# Altium PCB Horloge_seb.PcbDoc
Units mm, origin at the board's own origin, x right, y up, seen from the top; angles counter-clockwise.
Board outline 82 x 79 mm, 2 copper layers (Top Layer, Bottom Layer); 82 components, 100 nets, 338 pads, 55 vias.
Unrouted connection lines stored in the file: 4.
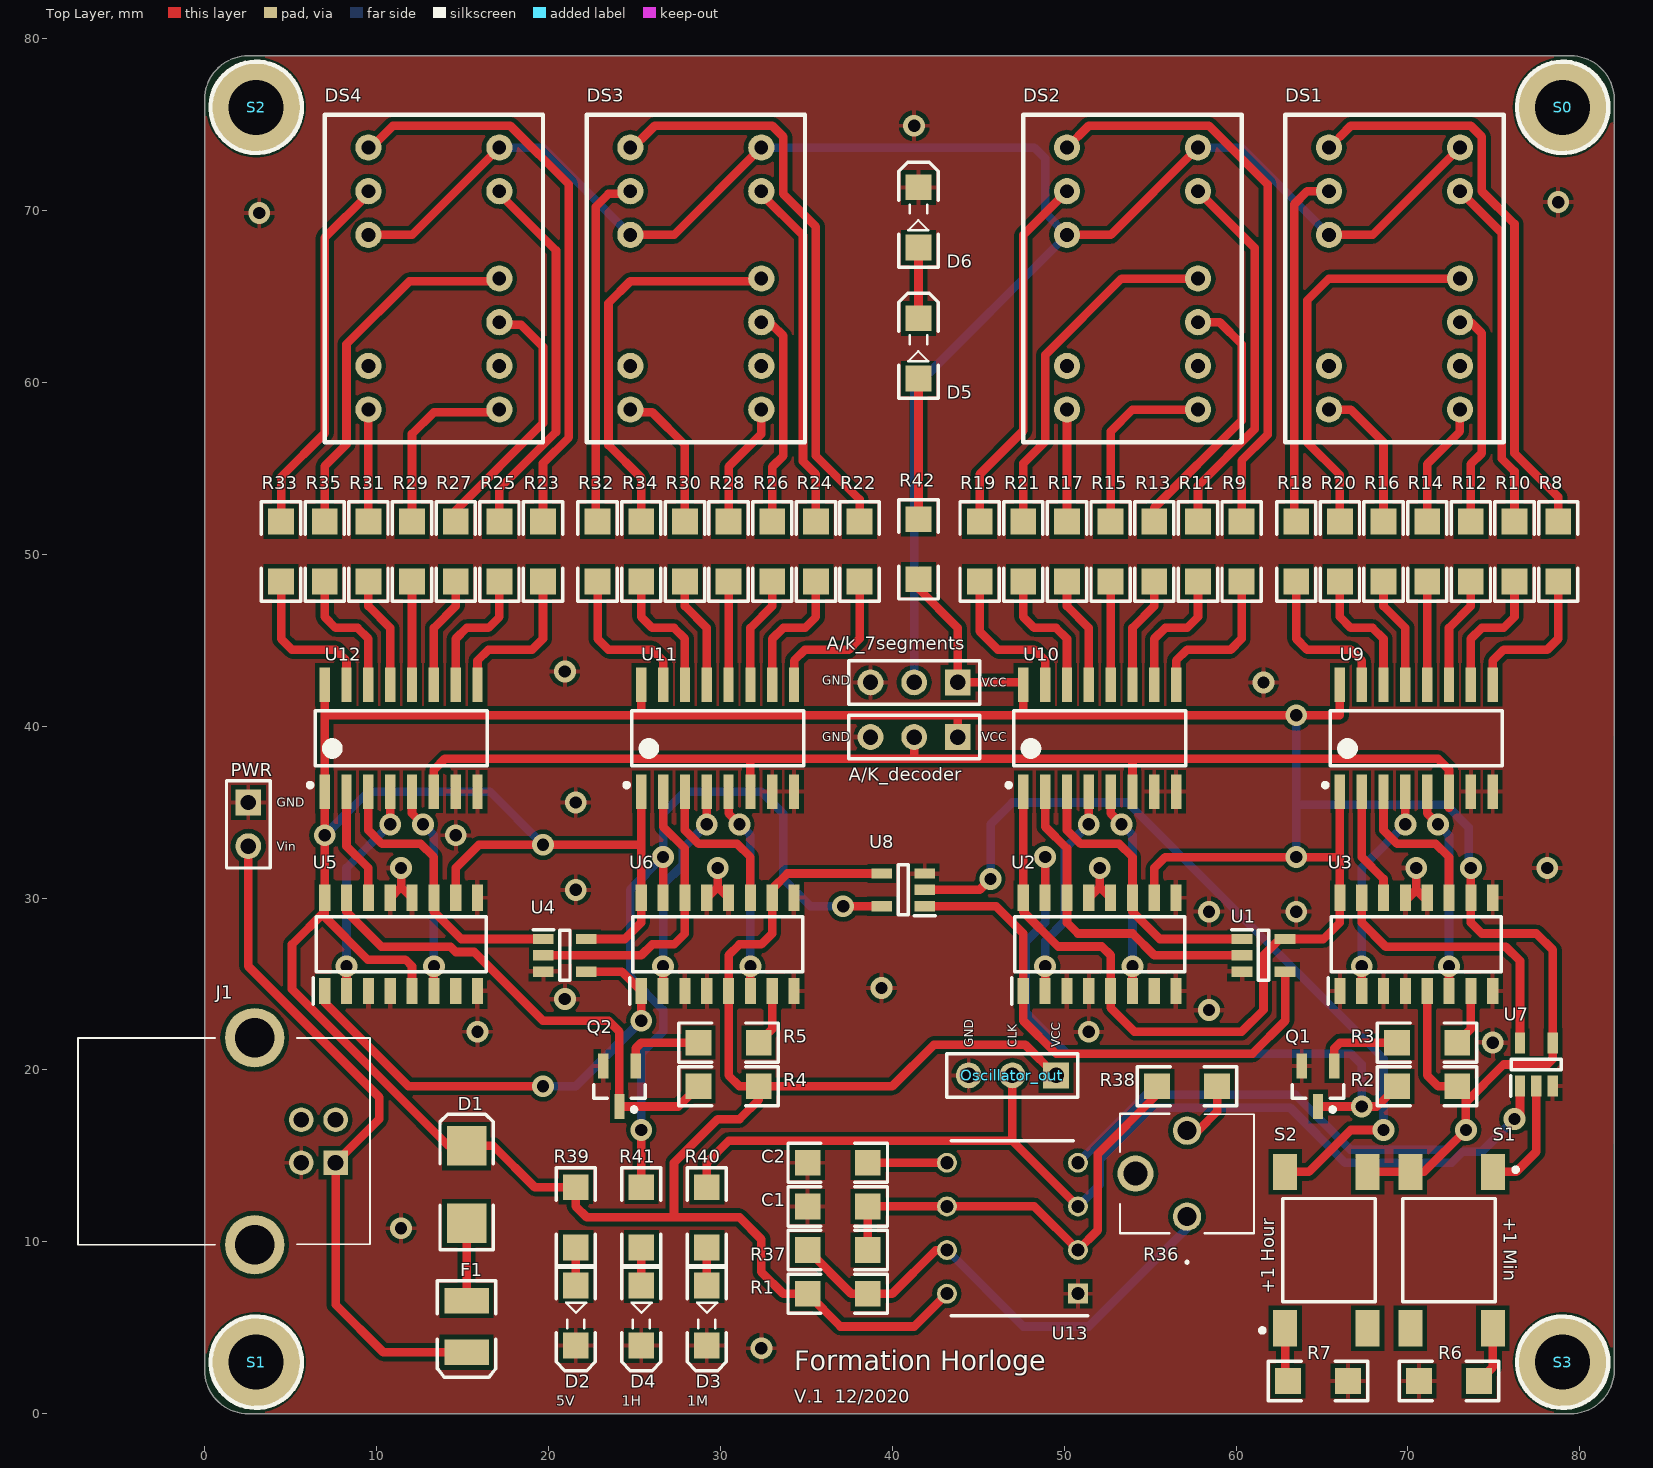
[diagram p0: Top Layer view]
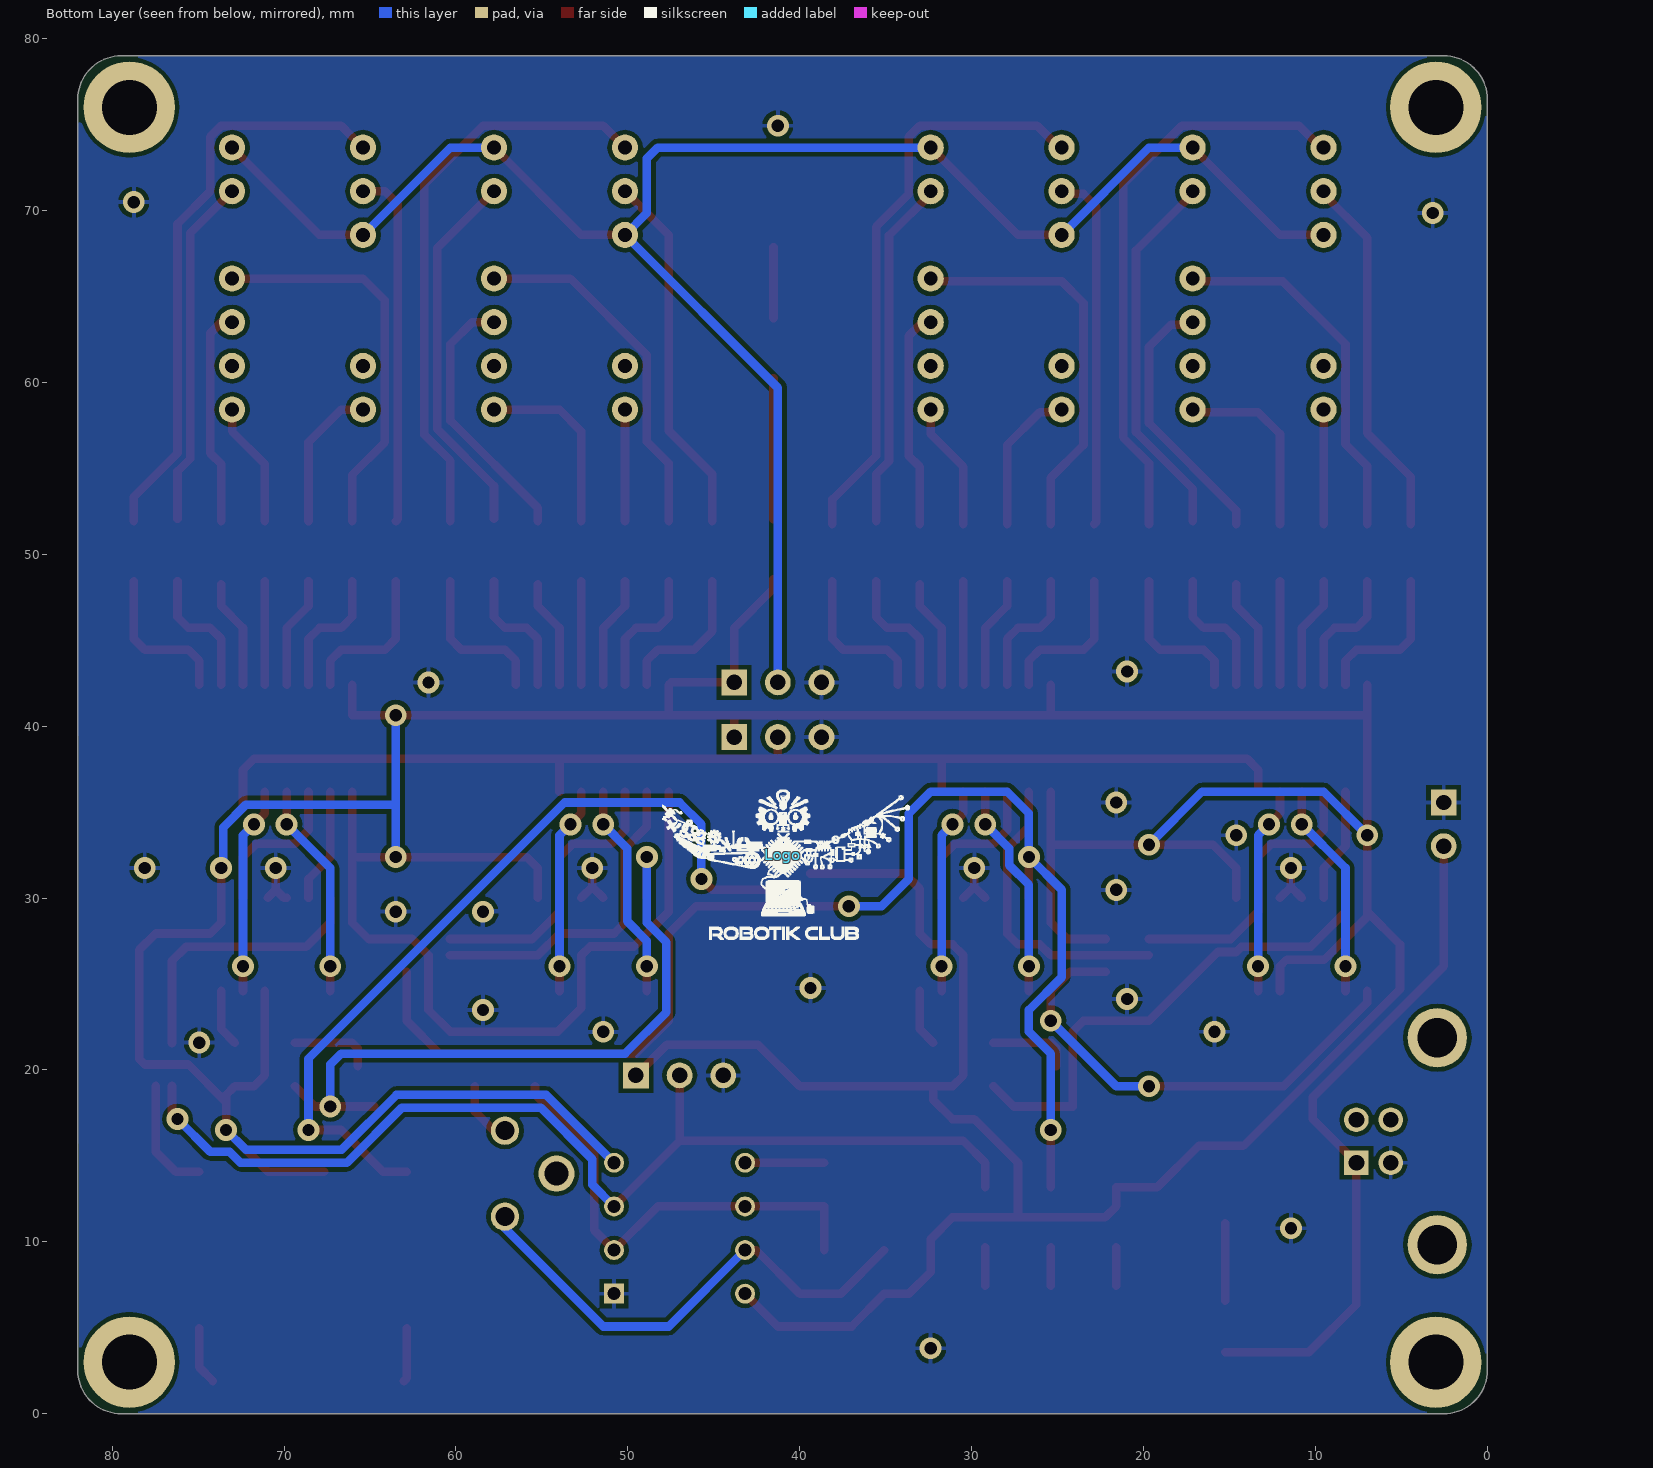
[diagram p1: Bottom Layer view, seen from below]
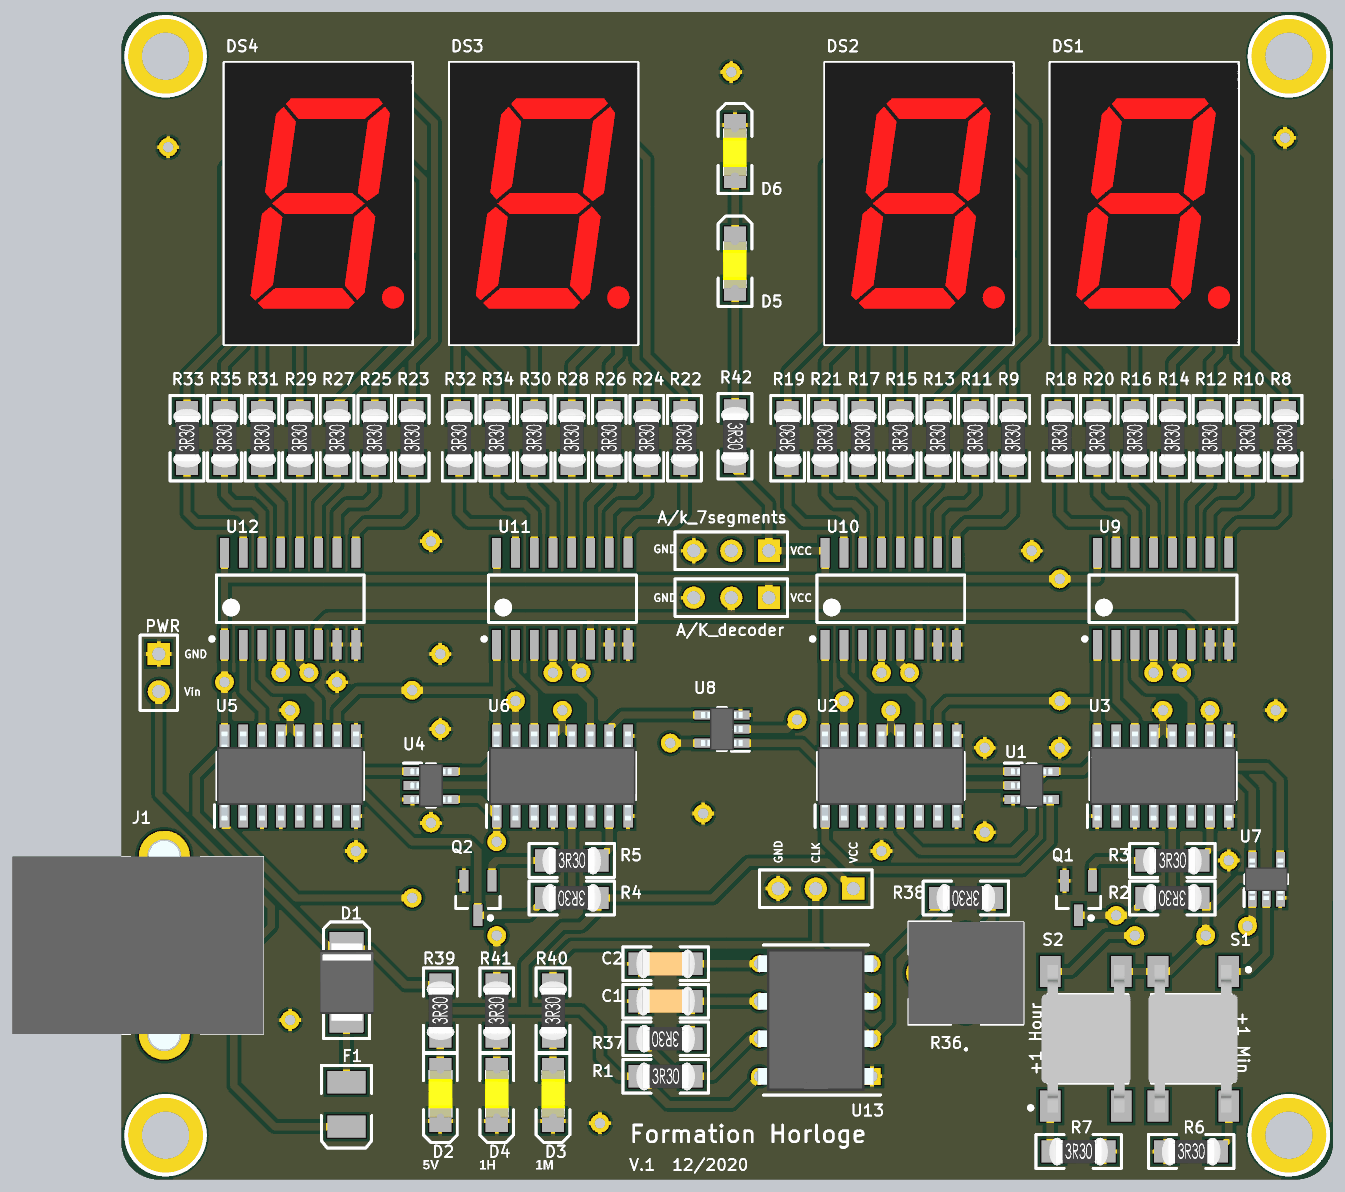
[diagram p2: 3D render of the assembled board from above, using the file's embedded part models]

## Layer stack, top to bottom
Top Solder: solder mask 0.0102, Solder Resist, Dk 3.5
Top Layer: signal copper 0.0356
Dielectric 1: dielectric 0.32, FR-4, Dk 4.8
Bottom Layer: signal copper 0.0356
Bottom Solder: solder mask 0.0102, Solder Resist, Dk 3.5

## Board outline
0,52 0,76.46 cw(c2.54,76.46) 2.54,79 19,79 79.46,79 cw(c79.46,76.46) 82,76.46 82,48 82,2.54 cw(c79.46,2.54) 79.46,0 59,0 2.54,0 cw(c2.54,2.54) 0,2.54 0,20

## Design rules (kind name [scope] priority, off if disabled: settings)
Clearance [All] p1: gap=0.254
PolygonConnect [All] p1: connectstyle=Relief reliefconductorwidth=0.254 reliefentries=4 polygonreliefangle="90 Angle" airgapwidth=0.254
RoutingVias [All] p1: holewidth=0.711 width=1.27 viastyle="Through Hole" minholewidth=0.711 minwidth=1.27 maxholewidth=0.711 maxwidth=1.27
SolderMaskExpansion [All] p1: expansion=0.102
Width [All] p1: maxlimit=2 minlimit=0.1 preferedwidth=0.5
30 further rules are at their usual default settings.

## Classes and differential pairs
component class Horloge_Counter: Q1 Q2 R2 R3 R4 R5 R6 R7 S1 S2 U1 U2 U3 U4 U5 U6 U7 U8
component class Horloge_Display: A/k_7segments A/K_decoder DS1 DS2 DS3 DS4 R8 R9 R10 R11 R12 R13 R14 R15 R16 R17 R18 R19 R20 R21 R22 R23 R24 R25 R26 R27 R28 R29 R30 R31 R32 R33 R34 R35 U9 U10 U11 U12
component class Horloge_Oscillator: C1 C2 D1 D2 D3 D4 D5 D6 F1 J1 Oscillator_out PWR R1 R36 R37 R38 R39 R40 R41 R42 S0 S1 S2 S3 U13

## Components (designator, comment, footprint, x,y, rotation, side; value= is the part's Value field where it differs from the comment)
A/k_7segments "Common_7-segments" HDR1X3 43.815,42.545 r180 top (schematic designator A/k_7_segments)
A/K_decoder "Header 3" HDR1X3 43.815,39.37 r180 top
C1 "Cap Pol1" "Capacitor 1206" 36.83,12.065 r180 top
C2 "Cap" "Capacitor 1206" 36.83,14.605 r0 top
D1 "LGE SS12" SMB 15.24,13.335 r180 top
D2 "5V_OK" KP-3216SEC 21.59,5.715 r270 top
D3 "CLK" KP-3216SEC 29.21,5.715 r270 top
D4 "HOUR" KP-3216SEC 25.4,5.715 r270 top
D5 "point" KP-3216SEC 41.529,61.976 r90 top
D6 "point" KP-3216SEC 41.529,69.596 r90 top
DS1 "Dpy Red-CA" "7 SEGMENTS 5082-7731" 65.405,73.66 r0 top
DS2 "Dpy Red-CA" "7 SEGMENTS 5082-7731" 50.165,73.66 r0 top
DS3 "Dpy Red-CA" "7 SEGMENTS 5082-7731" 24.765,73.66 r0 top
DS4 "Dpy Red-CA" "7 SEGMENTS 5082-7731" 9.525,73.66 r0 top
F1 "1A" 3.5X2.8X1.9 15.24,5.08 r270 top
J1 "67068-0000" 670680000 7.62,14.605 r270 top
Logo "Comment" Logo_lowres 41,32.508 r180 bottom
Oscillator_out "Header 3" HDR1X3 49.53,19.685 r180 top
PWR "Header 2" HDR1X2 2.54,35.56 r270 top (schematic designator P1)
Q1 "MOSFET-N" SOT23_M 64.77,19.05 r270 top
Q2 "MOSFET-N" SOT23_M 24.13,19.05 r270 top
R1 "Res2" "Resistor 1206" 36.83,6.985 r0 top
R2 "Res2" "Resistor 1206" 71.12,19.05 r180 top
R3 "Res2" "Resistor 1206" 71.12,21.59 r0 top
R4 "Res2" "Resistor 1206" 30.48,19.05 r180 top
R5 "Res2" "Resistor 1206" 30.48,21.59 r0 top
R6 "Res2" "Resistor 1206" 72.39,1.905 r0 top
R7 "Res2" "Resistor 1206" 64.77,1.905 r0 top
R8 "Res2" "Resistor 1206" 78.74,50.165 r90 top
R9 "Res2" "Resistor 1206" 60.325,50.165 r90 top
R10 "Res2" "Resistor 1206" 76.2,50.165 r90 top
R11 "Res2" "Resistor 1206" 57.785,50.165 r90 top
R12 "Res2" "Resistor 1206" 73.66,50.165 r90 top
R13 "Res2" "Resistor 1206" 55.245,50.165 r90 top
R14 "Res2" "Resistor 1206" 71.12,50.165 r90 top
R15 "Res2" "Resistor 1206" 52.705,50.165 r90 top
R16 "Res2" "Resistor 1206" 68.58,50.165 r90 top
R17 "Res2" "Resistor 1206" 50.165,50.165 r90 top
R18 "Res2" "Resistor 1206" 63.5,50.165 r90 top
R19 "Res2" "Resistor 1206" 45.085,50.165 r90 top
R20 "Res2" "Resistor 1206" 66.04,50.165 r90 top
R21 "Res2" "Resistor 1206" 47.625,50.165 r90 top
R22 "Res2" "Resistor 1206" 38.1,50.165 r90 top
R23 "Res2" "Resistor 1206" 19.685,50.165 r90 top
R24 "Res2" "Resistor 1206" 35.56,50.165 r90 top
R25 "Res2" "Resistor 1206" 17.145,50.165 r90 top
R26 "Res2" "Resistor 1206" 33.02,50.165 r90 top
R27 "Res2" "Resistor 1206" 14.605,50.165 r90 top
R28 "Res2" "Resistor 1206" 30.48,50.165 r90 top
R29 "Res2" "Resistor 1206" 12.065,50.165 r90 top
R30 "Res2" "Resistor 1206" 27.94,50.165 r90 top
R31 "Res2" "Resistor 1206" 9.525,50.165 r90 top
R32 "Res2" "Resistor 1206" 22.86,50.165 r90 top
R33 "Res2" "Resistor 1206" 4.445,50.165 r90 top
R34 "Res2" "Resistor 1206" 25.4,50.165 r90 top
R35 "Res2" "Resistor 1206" 6.985,50.165 r90 top
R36 "RPot" EVMAASA00B15 57.15,13.97 r90 top
R37 "Res2" "Resistor 1206" 36.83,9.525 r180 top
R38 "Res2" "Resistor 1206" 57.15,19.05 r180 top
R39 "Res2" "Resistor 1206" 21.59,11.43 r90 top
R40 "Res2" "Resistor 1206" 29.21,11.43 r90 top
R41 "Res2" "Resistor 1206" 25.4,11.43 r90 top
R42 "Res2" "Resistor 1206" 41.529,50.292 r270 top
S0 "Screw M3" "Screw M3" 79,76 r0 top
S1 "4-1437565-1" FSM-SWITCH 72.39,9.525 r0 top
S1 "Screw M3" "Screw M3" 3,3 r0 top
S2 "4-1437565-1" FSM-SWITCH 65.405,9.525 r180 top
S2 "Screw M3" "Screw M3" 3,76 r0 top
S3 "Screw M3" "Screw M3" 79,3 r0 top
U1 "SN74AHC1G08DBVR" SOT95P280X145-5N 61.595,26.67 r0 top
U2 "CD4029BM96" SOIC127P600X175-16N 52.07,27.305 r90 top
U3 "CD4029BM96" SOIC127P600X175-16N 70.485,27.305 r90 top
U4 "SN74AHC1G08DBVR" SOT95P280X145-5N 20.955,26.67 r0 top
U5 "CD4029BM96" SOIC127P600X175-16N 11.43,27.305 r90 top
U6 "CD4029BM96" SOIC127P600X175-16N 29.845,27.305 r90 top
U7 "SN74LVC1G32DBVT" SOT95P280X145-5N 77.47,20.32 r90 top
U8 "SN74LVC1G32DBVT" SOT95P280X145-5N 40.64,30.48 r180 top
U9 "7 segment driver" HEF4543 66.04,36.195 r90 top
U10 "7 segment driver" HEF4543 47.625,36.195 r90 top
U11 "7 segment driver" HEF4543 25.4,36.195 r90 top
U12 "7 segment driver" HEF4543 6.985,36.195 r90 top
U13 "NE555N" DIP762W56P254L959H533Q8N 46.99,10.795 r180 top

## Footprints (in the part's own frame and the unit in brackets; to place one, negate y for a bottom-side part, rotate by r counter-clockwise, add the part's x,y. Pads: shape width x height; smd on the part's side, far side on the other; paste and mask are expansions set on the pad)
3.5X2.8X1.9 [mm] "SM LED; 2 C-Bend Leads; Body 3.5 x 2.8 x 1.9 mm, inc leads (LxWxH typ)"
  rect 1.5x2.6 smd: 1(-1.5,0) 2(1.5,0)
  silkscreen extent -2.65,-1.7 2.95,1.7
"7 SEGMENTS 5082-7731" [mil] "pour Dpy Red-CA"
  round 60 hole 31.5: 1(0,-200) 2(0,-100) 3(300,-300) 4(0,-600) 5(300,-600) 6(300,0) 7(0,-500) 8(300,-400) 9(300,-100) 10(0,0) 14(300,-500)
  silkscreen extent -100,-675 400,75, body extent -100,-675 400,75, height 315
670680000 [mm]
  rect 1.431x1.431 hole 0.92: 1(0,0)
  round 1.431 hole 0.92: 2(-2.5,0) 3(-2.5,-2) 4(0,-2)
  round 3.45 hole 2.3: MH1(4.77,-4.71) MH2(-7.27,-4.71)
  silkscreen extent -7.25,-15 4.77,2, body extent -8.32,-14.99 5.82,2.01, height 11.1
"Capacitor 1206" [mm]
  rect 1.5x1.5 smd: 1(-1.75,0) 2(1.75,0)
  silkscreen extent -2.89,-1.14 2.89,1.14, body extent -1.98,-0.99 1.98,0.96, height 1.3
DIP762W56P254L959H533Q8N [mm]
  rect 1.16x1.16 hole 0.76: 1(-3.81,3.81)
  round 1.16 hole 0.76: 2(-3.81,1.27) 3(-3.81,-1.27) 4(-3.81,-3.81) 5(3.81,-3.81) 6(3.81,-1.27) 7(3.81,1.27) 8(3.81,3.81)
  silkscreen extent -4.39,-5.08 3.55,5.08, body extent -3.95,-4.79 3.95,4.79, height 5.33
EVMAASA00B15 [mm]
  round 1.65 hole 1.1: 1(-2.5,0) 3(2.5,0)
  round 2.1 hole 1.4: 2(0,3)
  silkscreen extent -5.2,-3.9 3.5,3.9, body extent -3.45,-3.9 3.45,3.9, height 7.7
FSM-SWITCH [mm]
  rect 1.4x2.1 smd: 1(2.55,4.55) 2(2.55,-4.55) 3(-2.25,4.55) 4(-2.25,-4.55)
  silkscreen extent -2.7,-3 4,4.8, body extent -2.87,-5 3.13,5, height 5.1
HDR1X2 [mm] "Connector; Header; 2 Position"
  rect 1.5x1.5 hole 0.9: 1(0,0)
  round 1.5 hole 0.9: 2(2.54,0)
  silkscreen extent -1.27,-1.27 3.81,1.27
HDR1X3 [mm] "Connector; Header; 3 Position"
  rect 1.5x1.5 hole 0.9: 1(0,0)
  round 1.5 hole 0.9: 2(2.54,0) 3(5.08,0)
  silkscreen extent -1.27,-1.27 6.35,1.27
HEF4543 [mm] "SOP, 16-Leads, Body 9,90x3,90mm, Pitch 1,27mm, IPC Medium Density"
  rect 2x0.6 smd: 1(0,0) 2(0,-1.27) 3(0,-2.54) 4(0,-3.81) 5(0,-5.08) 6(0,-6.35) 7(0,-7.62) 8(0,-8.89) 9(6.212,-8.89) 10(6.212,-7.62) 11(6.212,-6.35) 12(6.212,-5.08) 13(6.212,-3.81) 14(6.212,-2.54) 15(6.212,-1.27) 16(6.212,0)
  silkscreen extent 0.26,-9.45 4.71,0.97, body extent 1.11,-9.45 5.11,0.56, height 1.75
KP-3216SEC [mm]
  rect 1.5x1.5 smd: 1(-1.75,0) 2(1.75,0)
  silkscreen extent -2.89,-1.14 3.2,1.14, body extent -1.7,-0.79 1.5,0.81, height 1.1
Logo_lowres [mm]
  silkscreen extent -7.01,-4.93 7.39,3.76
"Resistor 1206" [mm]
  rect 1.5x1.5 smd: 1(-1.75,0) 2(1.75,0)
  silkscreen extent -2.89,-1.14 2.89,1.14, body extent -1.98,-0.95 1.98,0.93, height 0.55
"Screw M3" [mm] "M3 iso Screw"
  round 5.32 hole 3.2 unplated: 0(0,0)
  silkscreen extent -2.66,-2.66 2.66,2.66
SMB [mm] "SMB Didoe"
  rect 2.3x2.3 smd: 1(0,2.25) 2(0,-2.25)
  silkscreen extent -1.55,-4.1 1.55,3.8, body extent -1.84,-2.67 1.78,2.62, height 2.2
SOIC127P600X175-16N [mm]
  rect 1.525x0.65 smd: 1(-2.712,4.445) 2(-2.712,3.175) 3(-2.712,1.905) 4(-2.712,0.635) 5(-2.712,-0.635) 6(-2.712,-1.905) 7(-2.712,-3.175) 8(-2.712,-4.445) 9(2.712,-4.445) 10(2.712,-3.175) 11(2.712,-1.905) 12(2.712,-0.635) 13(2.712,0.635) 14(2.712,1.905) 15(2.712,3.175) 16(2.712,4.445)
  silkscreen extent -3.47,-4.95 1.6,5.12, body extent -3,-4.95 3,4.95, height 1.75
SOT23_M [mm] "SOT23, 3-Leads, Body 2.9x1.3mm, Pitch 0.95mm, Lead Span 2.3mm - Reverse Pinning, IPC Low Density"
  rect 1.45x0.6 smd: 1(1.175,0) 2(-1.175,-0.95) 3(-1.175,0.95)
  silkscreen extent -0.1,-1.5 1.47,1.5, body extent -0.7,-1.5 0.7,1.5, height 1.1
SOT95P280X145-5N [mm]
  rect 1.2x0.6 smd: 1(-1.25,0.95) 2(-1.25,0) 3(-1.25,-0.95) 4(1.25,-0.95) 5(1.25,0.95)
  silkscreen extent -1.85,-1.45 0.3,1.5, body extent -1.4,-1.45 1.4,1.45, height 1.45

## Part data
A/k_7segments: library part "Header 3", "Header, 3-Pin"
A/K_decoder Oscillator_out: "Header, 3-Pin"
C1: "Polarized Capacitor (Radial)"
C2: "Capacitor"
D1: library part Diode, "Default Diode"
D2 D3 D4 D5 D6: library part LED2, "Typical RED, GREEN, YELLOW, AMBER GaAs LED"
DS1 DS2 DS3 DS4: "7.62 mm Black Surface HER 7-Segment Display: CA, RH DP"
F1: library part "Fuse 2", "Fuse"
J1: "Connector"
PWR: "Header, 2-Pin"
Q1 Q2: "N-Channel MOSFET"
R1 R2 R3 R4 R5 R6 R7 R8 R9 R10 R11 R12 R13 R14 R15 R16 R17 R18 R19 R20 R21 R22 R23 R24 R25 R26 R27 R28 R29 R30 R31 R32 R33 R34 R35 R37 R38 R39 R40 R41 R42: "Resistor"
R36: "Potentiometer"
S1 S2: "Switch"
U1 U4: "Undefined or Miscellaneous"
U2 U3 U5 U6 U7 U8 U13: "Integrated Circuit"
U9 U10 U11 U12: library part HEF4543B

## Via types
v1: diameter 1.27, hole 0.711, Top Layer to Bottom Layer, 55 vias

## Nets (pads, with @x,y where several pads share a name; then routed paths per layer and width w, separated by ;. In a path a pad name is that pad's centre, name@x,y a point inside that pad or via, vN(x,y) a via of type N, cw(c..) or ccw(c..) an arc to the next point about the centre after c; other vN are vias at no path point)
1_HOUR: R41.2 U6.15 U8.5 | length 44.5
  Top Layer w0.5: R41.2 v1(25.4,16.51) ; U6.15 v1(26.67,32.385) ; v1(37.145,29.53) U8.5
  Bottom Layer w0.5: v1(25.4,16.51) 25.4,20.955 26.67,22.225 26.67,23.495 24.765,25.4 24.765,30.48 v1(26.67,32.385) 26.67,34.925 27.94,36.195 32.385,36.195 33.655,34.925 33.655,31.115 35.24,29.53 v1(37.145,29.53)
1_HOUR_BTN: R7.1 S2.1 S2.2 U8.2 | length 50.8
  Top Layer w0.5: U8.2 45.085,30.48 v1(45.72,31.115) ; S2.1 62.855,2.07 R7.1 ; S2.2 64.24,14.075 66.675,16.51 v1(68.58,16.51)
  Bottom Layer w0.5: v1(45.72,31.115) 45.72,34.29 46.99,35.56 53.681,35.56 68.58,20.661 v1(68.58,16.51)
1_MINUTE: U3.15 U7.5 | length 16.4
  Top Layer w0.5: U3.15 67.31,28.575 68.711,27.174 75.696,27.174 76.52,26.35 U7.5
1_MINUTE_BTN: R6.2 S1.1 S1.2 U7.2 | length 10.2
  Top Layer w0.5: R6.2 74.94,2.705 S1.2 ; S1.1 76.305,14.075 77.47,15.24 U7.2
10_HEURES: Q2.1 R4.2 U5.15 | length 29
  Top Layer w0.5: U5.15 8.255,29.21 10.291,27.174 14.305,27.174 14.613,26.866 15.679,26.866 19.685,22.86 23.495,22.86 24.13,22.225 Q2.1 27.555,17.875 R4.2
10_MINUTES: Q1.1 R2.2 U2.15 | length 40.2
  Top Layer w0.5: U2.15 v1(48.895,32.385) ; Q1.1 v1(67.31,17.875) 68.195,17.875 R2.2
  Bottom Layer w0.5: v1(48.895,32.385) 48.895,28.575 47.756,27.436 47.756,23.364 50.165,20.955 66.675,20.955 67.31,20.32 v1(67.31,17.875)
24_HEURES: U4.4 U5.1 U6.1 | length 28.1
  Top Layer w0.5: U5.1 6.985,23.926 11.861,19.05 v1(19.685,19.05) ; U4.4 24.273,25.72 U6.1 v1(25.4,22.86)
  Bottom Layer w0.5: v1(19.685,19.05) 21.59,19.05 v1(25.4,22.86)
60_MINUTES: U1.4 U2.1 U8.1 | length 31.1
  Top Layer w0.5: U8.1 46.035,29.53 47.625,27.94 U2.1 47.625,22.86 49.53,20.955 60.96,20.955 62.865,22.86 U1.4@62.865,25.7
CLOCK: Oscillator_out.2 R40.2 U7.1 U13.3 | length 62
  Top Layer w0.5: R40.2 29.21,14.605 30.48,15.875 46.99,15.875 ; Oscillator_out.2 46.99,15.875 ; U13.3 46.99,15.875 ; v1(76.2,17.145) 76.52,17.465 U7.1
  Bottom Layer w0.5: U13.3 52.07,13.335 52.07,14.809 55.06,17.799 63.15,17.799 66.344,14.605 72.531,14.605 73.166,15.24 74.295,15.24 v1(76.2,17.145)
GND: A/k_7segments.3 A/K_decoder.3 C1.2 C2.1 D2.2 D3.2 D4.2 D6.2 J1.4 Oscillator_out.3 PWR.1 Q1.2 Q2.2 R6.1 R7.2 U1.3 U2.3 U2.4 U2.8 U2.9 U2.12 U2.13 U3.1 U3.3 U3.4 U3.8 U3.9 U3.12 U3.13 U4.3 U5.3 U5.4 U5.8 U5.9 U5.12 U5.13 U6.3 U6.4 U6.8 U6.9 U6.12 U6.13 U7.3 U8.3 U9.7 U9.8 U10.7 U10.8 U11.7 U11.8 U12.7 U12.8 U13.1 | length 11.4
  Top Layer w0.5: U5.13 11.43,30.652 ; v1(11.43,31.75) 11.43,30.652 ; U5.12 11.43,30.652 ; U6.13 29.845,30.652 ; v1(29.845,31.75) 29.845,30.652 ; U6.12 29.845,30.652 ; U2.13 52.07,30.652 ; v1(52.07,31.75) 52.07,30.652 ; U2.12 52.07,30.652 ; U3.13 70.022,30.017 70.485,30.48 ; v1(70.485,31.75) 70.485,30.48 ; U3.12@70.948,30.017 70.485,30.48
  other v1: 32.385,3.81 11.43,10.795 74.93,21.59 15.875,22.225 51.435,22.225 58.42,23.495 20.955,24.13 39.37,24.765 58.42,29.21 63.5,29.21 21.59,30.48 78.105,31.75 14.605,33.655 21.59,35.56 61.595,42.545 20.955,43.18 3.175,69.85 78.74,70.485 41.275,74.93
HEURES_DIZAINES_D0: U5.6 U12.5 | length 12.1
  Top Layer w0.5: U12.5 12.065,34.925 v1(12.7,34.29) ; U5.6 v1(13.335,26.035)
  Bottom Layer w0.5: v1(12.7,34.29) 13.335,33.655 v1(13.335,26.035)
HEURES_DIZAINES_D1: U4.1 U5.11 U12.3 | length 16.9
  Top Layer w0.5: U12.3 9.525,33.949 10.323,33.151 12.569,33.151 13.335,32.385 U5.11 13.335,29.21 14.925,27.62 U4.1
HEURES_DIZAINES_D2: U5.14 U12.2 | length 6.7
  Top Layer w0.5: U12.2 8.255,33.02 9.525,31.75 U5.14
HEURES_DIZAINES_D3: U5.2 U12.4 | length 12.7
  Top Layer w0.5: U5.2 v1(8.255,26.035) ; v1(10.795,34.29) U12.4
  Bottom Layer w0.5: v1(8.255,26.035) 8.255,31.75 v1(10.795,34.29)
HEURES_UNITES_D0: U6.6 U11.5 | length 12.1
  Top Layer w0.5: U11.5 30.48,34.925 v1(31.115,34.29) ; U6.6 v1(31.75,26.035)
  Bottom Layer w0.5: v1(31.115,34.29) 31.75,33.655 v1(31.75,26.035)
HEURES_UNITES_D1: U6.11 U11.3 | length 9.1
  Top Layer w0.5: U11.3 27.94,33.949 28.738,33.151 30.984,33.151 31.75,32.385 U6.11
HEURES_UNITES_D2: U4.2 U6.14 U11.2 | length 17.5
  Top Layer w0.5: U4.2 25.4,26.67 26.035,27.305 27.305,27.305 27.94,27.94 U6.14 27.94,32.883 26.67,34.153 U11.2
HEURES_UNITES_D3: U6.2 U11.4 | length 12.7
  Top Layer w0.5: U6.2 v1(26.67,26.035) ; v1(29.21,34.29) U11.4
  Bottom Layer w0.5: v1(26.67,26.035) 26.67,30.774 27.809,31.913 27.809,32.889 v1(29.21,34.29)
LED_ANODE_CATHODE?: A/k_7segments.2 DS1.1 DS1.6 DS2.1 DS2.6 DS3.1 DS3.6 DS4.1 DS4.6 | length 109.8
  Top Layer w0.5: DS4.1 12.065,68.58 DS4.6 ; DS3.1 27.305,68.58 DS3.6 ; DS2.1 52.705,68.58 DS2.6 ; DS1.1 67.945,68.58 DS1.6
  Bottom Layer w0.5: DS4.6 19.685,73.66 DS3.1 ; DS3.6 48.26,73.66 48.895,73.025 48.895,69.85 DS2.1 41.275,59.69 A/k_7segments.2 ; DS2.6 60.325,73.66 DS1.1
MINUTES_DIZAINES_D0: U2.6 U10.5 | length 12.1
  Top Layer w0.5: U10.5 52.705,34.925 v1(53.34,34.29) ; U2.6 v1(53.975,26.035)
  Bottom Layer w0.5: v1(53.34,34.29) 53.975,33.655 v1(53.975,26.035)
MINUTES_DIZAINES_D1: U1.1 U2.11 U10.3 | length 16.9
  Top Layer w0.5: U10.3 50.165,33.949 50.963,33.151 53.209,33.151 53.975,32.385 U2.11 53.975,29.21 55.565,27.62 U1.1
MINUTES_DIZAINES_D2: U1.2 U2.14 U10.2 | length 19.1
  Top Layer w0.5: U10.2 48.895,34.153 50.165,32.883 U2.14 50.165,28.575 50.8,27.94 53.975,27.94 55.245,26.67 U1.2
MINUTES_DIZAINES_D3: U2.2 U10.4 | length 12.7
  Top Layer w0.5: U2.2 v1(48.895,26.035) ; v1(51.435,34.29) U10.4
  Bottom Layer w0.5: v1(48.895,26.035) 48.895,27.509 50.034,28.648 50.034,32.889 v1(51.435,34.29)
MINUTES_UNITES_D0: U3.6 U9.5 | length 12.1
  Top Layer w0.5: U9.5 71.12,34.925 v1(71.755,34.29) ; U3.6 v1(72.39,26.035)
  Bottom Layer w0.5: v1(71.755,34.29) 72.39,33.655 v1(72.39,26.035)
MINUTES_UNITES_D1: U3.11 U9.3 | length 9.1
  Top Layer w0.5: U9.3 68.58,33.949 69.378,33.151 71.624,33.151 72.39,32.385 U3.11
MINUTES_UNITES_D2: U3.14 U9.2 | length 6.7
  Top Layer w0.5: U9.2 67.31,32.385 68.58,31.115 U3.14
MINUTES_UNITES_D3: U3.2 U9.4 | length 12.7
  Top Layer w0.5: U3.2 v1(67.31,26.035) ; v1(69.85,34.29) U9.4
  Bottom Layer w0.5: v1(67.31,26.035) 67.31,31.75 v1(69.85,34.29)
NetC1_1: C1.1 R37.1 R38.2 U13.2 U13.6 | length 27.2
  Top Layer w0.5: R37.1 C1.1 U13.6 48.26,12.065 U13.2 51.95,10.675 51.95,15.12 55.4,18.57 R38.2
NetC2_2: C2.2 U13.5 | length 4.6
  Top Layer w0.5: C2.2 U13.5
NetD1_1: D1.1 F1.1 | length 4.5
  Top Layer w0.5: F1.1 D1.1
NetD2_1: D2.1 R39.1 | length 2.2
  Top Layer w0.5: D2.1 R39.1
NetD3_1: D3.1 R40.1 | length 2.2
  Top Layer w0.5: D3.1 R40.1
NetD4_1: D4.1 R41.1 | length 2.2
  Top Layer w0.5: D4.1 R41.1
NetD5_1: D5.1 R42.1 | length 8.2
  Top Layer w0.5: R42.1 D5.1
NetD5_2: D5.2 D6.1 | length 4.1
  Top Layer w0.5: D5.2 D6.1
NetDS1_2: DS1.2 R18.2 | length 20.8
  Top Layer w0.5: R18.2 63.381,52.034 63.381,70.366 64.135,71.12 DS1.2
NetDS1_3: DS1.3 R20.2 | length 23.1
  Top Layer w0.5: R20.2 66.04,54.61 64.135,56.515 64.135,64.77 65.405,66.04 DS1.3
NetDS1_4: DS1.4 R16.2 | length 8.6
  Top Layer w0.5: DS1.4 66.675,58.42 68.58,56.515 R16.2
NetDS1_5: DS1.5 R14.2 | length 7.3
  Top Layer w0.5: R14.2 71.12,55.245 73.025,57.15 DS1.5
NetDS1_8: DS1.8 R12.2 | length 12.7
  Top Layer w0.5: DS1.8 73.66,63.5 74.295,62.865 74.295,55.88 73.66,55.245 R12.2
NetDS1_9: DS1.9 R10.2 | length 20.4
  Top Layer w0.5: DS1.9 75.446,68.699 75.446,55.568 76.2,54.814 R10.2@76.2,52.07
NetDS1_10: DS1.10 R8.2 | length 33
  Top Layer w0.5: 66.04,74.295 66.675,74.93 73.66,74.93 74.295,74.295 74.295,71.12 76.2,69.215 76.2,55.88 78.74,53.34 R8.2
NetDS2_2: DS2.2 R19.2 | length 21.3
  Top Layer w0.5: R19.2 45.085,54.652 47.625,57.192 47.625,68.58 DS2.2
NetDS2_3: DS2.3 R21.2 | length 20.9
  Top Layer w0.5: R21.2 47.625,55.287 48.895,56.557 48.895,61.595 53.34,66.04 DS2.3
NetDS2_4: DS2.4 R17.2 | length 6.5
  Top Layer w0.5: R17.2 DS2.4
NetDS2_5: DS2.5 R15.2 | length 10.7
  Top Layer w0.5: R15.2 52.705,57.15 53.975,58.42 57.15,58.42 DS2.5@57.468,58.737
NetDS2_8: DS2.8 R13.2 | length 15.5
  Top Layer w0.5: R13.2 55.245,52.705 60.325,57.785 60.325,62.23 59.055,63.5 DS2.8
NetDS2_9: DS2.9 R11.2 | length 21.8
  Top Layer w0.5: R11.2@57.785,52.07 57.785,53.975 61.079,57.269 61.079,67.826 DS2.9
NetDS2_10: DS2.10 R9.2 | length 33.8
  Top Layer w0.5: DS2.10 51.435,74.93 56.4,74.93 56.404,74.926 58.424,74.926 61.833,71.517 61.833,56.957 60.325,55.449 R9.2
NetDS3_2: DS3.2 R32.2 | length 20.8
  Top Layer w0.5: R32.2@22.86,51.76 22.741,51.879 22.741,70.211 23.495,70.965 DS3.2@24.765,70.965
NetDS3_3: DS3.3 R34.2 | length 23.1
  Top Layer w0.5: R34.2@25.4,51.76 25.4,54.455 23.495,56.36 23.495,64.615 24.765,65.885 DS3.3@32.385,65.885
NetDS3_4: DS3.4 R30.2 | length 8.6
  Top Layer w0.5: DS3.4@24.765,58.265 26.035,58.265 27.94,56.36 R30.2@27.94,51.76
NetDS3_5: DS3.5 R28.2 | length 7.3
  Top Layer w0.5: R28.2@30.48,51.76 30.48,55.09 32.385,56.995 DS3.5@32.385,58.265
NetDS3_8: DS3.8 R26.2 | length 12.7
  Top Layer w0.5: DS3.8@32.385,63.345 33.02,63.345 33.655,62.71 33.655,55.725 33.02,55.09 R26.2@33.02,51.76
NetDS3_9: DS3.9 R24.2 | length 20.4
  Top Layer w0.5: DS3.9@32.385,70.965 34.806,68.544 34.806,55.413 35.56,54.659 R24.2
NetDS3_10: DS3.10 R22.2 | length 33.2
  Top Layer w0.5: 25.4,74.14 26.186,74.926 33.024,74.926 33.655,74.295 33.655,70.965 35.56,69.06 35.56,55.725 38.1,53.185 R22.2@38.1,51.76
NetDS4_2: DS4.2 R33.2 | length 21.3
  Top Layer w0.5: R33.2@4.445,51.76 4.445,54.497 6.985,57.037 6.985,68.425 DS4.2@9.525,70.965
NetDS4_3: DS4.3 R35.2 | length 21.4
  Top Layer w0.5: R35.2@6.985,51.76 6.985,55.132 8.255,56.402 8.255,62.23 11.91,65.885 DS4.3@17.145,65.885
NetDS4_4: DS4.4 R31.2 | length 6.5
  Top Layer w0.5: R31.2@9.525,51.76 DS4.4@9.525,58.265
NetDS4_5: DS4.5 R29.2 | length 10.7
  Top Layer w0.5: R29.2@12.065,51.76 12.065,56.995 13.335,58.265 16.51,58.265 DS4.5@16.828,58.582
NetDS4_8: DS4.8 R27.2 | length 15.5
  Top Layer w0.5: R27.2@14.605,51.76 14.605,52.55 19.685,57.63 19.685,62.075 18.415,63.345 DS4.8@17.145,63.345
NetDS4_9: DS4.9 R25.2 | length 21.8
  Top Layer w0.5: R25.2 17.145,53.82 20.439,57.114 20.439,67.671 DS4.9@17.145,70.965
NetDS4_10: DS4.10 R23.2 | length 34.1
  Top Layer w0.5: DS4.10@9.525,73.505 10.95,74.93 15.605,74.93 15.609,74.926 17.784,74.926 21.193,71.517 21.193,56.802 19.685,55.294 R23.2@19.685,51.76
NetQ1_2: Q1.3 R3.1 | length 4.8
  Top Layer w0.5: Q1.3 65.72,21.27 66.04,21.59 R3.1
NetQ2_2: Q2.3 R5.1 | length 4.8
  Top Layer w0.5: Q2.3 25.08,21.27 25.4,21.59 R5.1
NetR1_2: R1.2 R36.1 R37.2 U13.7 | length 29.1
  Top Layer w0.5: R37.2 37.62,6.985 R1.2 40.005,6.985 42.545,9.525 U13.7
  Bottom Layer w0.5: U13.7 47.625,5.08 51.435,5.08 57.15,10.795 R36.1
NetR8_1: R8.1 U9.9 | length 9.1
  Top Layer w0.5: U9.9 74.93,43.815 75.565,44.45 78.105,44.45 78.74,45.085 R8.1
NetR9_1: R9.1 U10.9 | length 9.1
  Top Layer w0.5: U10.9 56.515,43.815 57.15,44.45 59.69,44.45 60.325,45.085 R9.1
NetR10_1: R10.1 U9.10 | length 7.8
  Top Layer w0.5: U9.10 73.66,45.085 74.295,45.72 75.565,45.72 76.2,46.355 R10.1
NetR11_1: R11.1 U10.10 | length 7.8
  Top Layer w0.5: U10.10 55.245,45.085 55.88,45.72 57.15,45.72 57.785,46.355 R11.1
NetR12_1: R12.1 U9.11 | length 6.4
  Top Layer w0.5: U9.11 72.39,45.72 73.66,46.99 R12.1@73.66,48.26
NetR13_1: R13.1 U10.11 | length 6.4
  Top Layer w0.5: U10.11 53.975,45.72 55.245,46.99 R13.1@55.245,48.26
NetR14_1: R14.1 U9.12 | length 6
  Top Layer w0.5: U9.12 R14.1
NetR15_1: R15.1 U10.12 | length 6
  Top Layer w0.5: U10.12 R15.1
NetR16_1: R16.1 U9.13 | length 6.5
  Top Layer w0.5: R16.1 68.58,46.99 69.85,45.72 U9.13
NetR17_1: R17.1 U10.13 | length 6.5
  Top Layer w0.5: R17.1 50.165,46.99 51.435,45.72 U10.13
NetR18_1: R18.1 U9.15 | length 9.1
  Top Layer w0.5: R18.1 63.5,45.085 64.135,44.45 66.675,44.45 67.31,43.815 U9.15
NetR19_1: R19.1 U10.15 | length 8.8
  Top Layer w0.5: R19.1 45.085,45.516 46.151,44.45 48.26,44.45 48.895,43.815 U10.15
NetR20_1: R20.1 U9.14 | length 7.8
  Top Layer w0.5: R20.1 66.04,46.355 66.675,45.72 67.945,45.72 68.58,45.085 U9.14
NetR21_1: R21.1 U10.14 | length 7.8
  Top Layer w0.5: R21.1 47.625,46.355 48.26,45.72 49.53,45.72 50.165,45.085 U10.14
NetR22_1: R22.1 U11.9 | length 9.1
  Top Layer w0.5: U11.9 34.29,43.815 34.925,44.45 37.465,44.45 38.1,45.085 R22.1
NetR23_1: R23.1 U12.9 | length 9.1
  Top Layer w0.5: U12.9 15.875,43.815 16.51,44.45 19.05,44.45 19.685,45.085 R23.1
NetR24_1: R24.1 U11.10 | length 7.8
  Top Layer w0.5: U11.10 33.02,45.085 33.655,45.72 34.925,45.72 35.56,46.355 R24.1
NetR25_1: R25.1 U12.10 | length 7.8
  Top Layer w0.5: U12.10 14.605,45.085 15.24,45.72 16.51,45.72 17.145,46.355 R25.1
NetR26_1: R26.1 U11.11 | length 6.4
  Top Layer w0.5: U11.11 31.75,45.72 33.02,46.99 R26.1@33.02,48.26
NetR27_1: R27.1 U12.11 | length 6.4
  Top Layer w0.5: U12.11 13.335,45.72 14.605,46.99 R27.1@14.605,48.26
NetR28_1: R28.1 U11.12 | length 6
  Top Layer w0.5: U11.12 R28.1
NetR29_1: R29.1 U12.12 | length 6
  Top Layer w0.5: U12.12 R29.1
NetR30_1: R30.1 U11.13 | length 6.5
  Top Layer w0.5: R30.1 27.94,46.99 29.21,45.72 U11.13
NetR31_1: R31.1 U12.13 | length 6.5
  Top Layer w0.5: R31.1 9.525,46.99 10.795,45.72 U12.13
NetR32_1: R32.1 U11.15 | length 9.1
  Top Layer w0.5: R32.1 22.86,45.085 23.495,44.45 26.035,44.45 26.67,43.815 U11.15
NetR33_1: R33.1 U12.15 | length 9.1
  Top Layer w0.5: R33.1 4.445,45.085 5.08,44.45 7.62,44.45 8.255,43.815 U12.15
NetR34_1: R34.1 U11.14 | length 7.8
  Top Layer w0.5: R34.1 25.4,46.355 26.035,45.72 27.305,45.72 27.94,45.085 U11.14
NetR35_1: R35.1 U12.14 | length 7.8
  Top Layer w0.5: R35.1 6.985,46.355 7.62,45.72 8.89,45.72 9.525,45.085 U12.14
NetR36_3: R36.3 R38.1 | length 3.7
  Top Layer w0.5: R36.3 57.785,16.47 58.9,17.585 R38.1
NOT_10_HEURES: R5.2 U6.7 | length 3.3
  Top Layer w0.5: R5.2 33.02,22.38 U6.7
NOT_10_MINUTES: R3.2 U3.7 | length 3.3
  Top Layer w0.5: R3.2 73.66,22.38 U3.7
PUCE_ANODE_CATHODE?: A/K_decoder.2 U9.6 U10.6 U11.6 U12.6 | length 68.1
  Top Layer w0.5: U12.6 13.335,37.465 13.97,38.1 31.75,38.1 ; U11.6 31.75,38.1 ; A/K_decoder.2 41.275,38.1 ; U10.6 53.975,38.1 ; U9.6@72.39,35.266 U9.6 72.39,37.465 71.755,38.1 53.975,38.1 ; 31.75,38.1 41.275,38.1 ; 41.275,38.1 53.975,38.1
V_IN: F1.2 J1.1 PWR.2 | length 39.6
  Top Layer w0.5: PWR.2 2.54,26.035 10.16,18.415 10.16,17.145 J1.1 7.62,6.35 10.39,3.58 F1.2
VCC: A/k_7segments.1 A/K_decoder.1 D1.2 Oscillator_out.1 R1.1 R2.1 R4.1 R39.2 R42.2 S1.3 S1.4 S2.3 S2.4 U1.5 U2.5 U2.10 U2.16 U3.5 U3.10 U3.16 U4.5 U5.5 U5.10 U5.16 U6.5 U6.10 U6.16 U7.4 U8.4 U9.1 U9.16 U10.1 U10.16 U11.1 U11.16 U12.1 U12.16 U13.4 U13.8 | length 381.6
  Top Layer w0.5: U12.16 6.985,40.64 ; U5.5 12.065,26.035 11.68,26.42 9.481,26.42 6.985,28.916 6.985,29.21 ; U5.10 14.605,31.75 15.961,33.106 v1(19.685,33.106) 25.4,33.106 ; U4.5 24.445,27.62 25.4,28.575 U6.16 25.4,33.106 ; U11.1 25.4,33.106 ; U11.16 25.4,40.64 ; U8.4 33.903,31.43 33.02,30.547 U6.10 33.02,27.94 32.385,27.305 31.115,27.305 30.48,26.67 U6.5 30.48,19.685 31.115,19.05 R4.1 ; R42.2 41.529,48.006 43.815,45.72 A/k_7segments.1 47.487,42.545 U10.16 47.625,40.64 ; U13.8 41.275,5.08 36.985,5.08 R1.1 33.655,6.985 32.385,8.255 32.385,10.16 31.115,11.43 27.305,11.43 ; A/K_decoder.1 43.815,40.64 ; U10.1 U2.16 47.625,29.21 49.649,27.186 52.189,27.186 52.705,26.67 U2.5 52.705,23.614 54.094,22.225 60.325,22.225 61.595,23.495 61.595,26.67 62.545,27.62 U1.5 65.085,27.62 66.04,28.575 U3.16 66.04,32.385 ; Oscillator_out.1 47.744,21.471 42.426,21.471 40.005,19.05 R4.1 ; U2.10 55.245,31.75 55.88,32.385 v1(63.5,32.385) 66.04,32.385 ; U9.1 66.04,32.385 ; U9.16 66.04,40.64 v1(63.5,40.64) 47.625,40.64 ; S2.4 S1.3 70.935,14.075 v1(73.37,16.51) 73.37,18.125 ; U3.5 71.12,19.685 71.755,19.05 R2.1 73.37,18.55 73.37,18.125 ; v1(73.66,31.75) U3.10 73.66,28.575 74.295,27.94 77.47,27.94 78.42,26.99 U7.4 78.42,20.635 78.105,20.32 75.565,20.32 73.37,18.125 ; 6.985,29.21 5.08,27.305 5.08,24.698 14.193,15.585 D1.2 16.8,15.585 19.205,13.18 R39.2 21.59,12.065 22.225,11.43 27.305,11.43 ; 6.985,29.21 U5.16 v1(6.985,33.655) U12.1 6.985,40.64 ; 6.985,40.64 25.4,40.64 ; 25.4,40.64 43.815,40.64 ; 27.305,11.43 27.305,14.605 29.845,17.145 31.115,17.145 32.23,18.26 R4.1 ; 43.815,40.64 47.625,40.64
  Bottom Layer w0.5: v1(6.985,33.655) 9.525,36.195 16.596,36.195 v1(19.685,33.106) ; U13.4 54.748,18.553 63.462,18.553 66.656,15.359 72.219,15.359 v1(73.37,16.51) ; v1(63.5,32.385) 63.5,35.429 ; v1(63.5,40.64) 63.5,35.429 ; v1(73.66,31.75) 73.529,31.881 73.529,34.127 72.227,35.429 63.5,35.429
pads on no net: DS1.7 DS1.14 DS2.7 DS2.14 DS3.7 DS3.14 DS4.7 DS4.14 J1.2 J1.3 J1.MH1 J1.MH2 R36.2 S0.0 S1.0 S2.0 S3.0 U2.7 U5.7

## Polygon pours and split planes (outlines as drawn)
GND on Top Layer "Top Layer-GND" (solid, pour order 12): 0,3 3,0 79,0 81.915,3.192 82,75 79,79 3,79 0,76
GND on Bottom Layer "Bot Layer-GND" (solid, pour order 16): 0,3 3,0 79,0 81.915,3.192 82,75 79,79 3,79 0,76

## Silkscreen, mask and mechanical layers (free items; w line width, h text height)
Top Overlay:
  text "GND" at 35.941,42.418 h0.51
  text "VCC" at 45.212,42.291 h0.51
  text "GND" at 35.941,39.116 h0.51
  text "VCC" at 45.212,39.116 h0.51
  text "GND" at 4.191,35.306 h0.51
  text "Vin" at 4.191,32.766 h0.51
  text "GND" at 44.704,21.336 h0.51 r90
  text "CLK" at 47.244,21.336 h0.51 r90
  text "VCC" at 49.784,21.336 h0.51 r90
  text "+1 Min" at 75.565,11.43 h0.76 r270
  text "+1 Hour" at 62.23,6.985 h0.76 r90
  text "Formation Horloge" at 34.29,2.54 h1.14
  text "V.1  12/2020" at 34.29,0.635 h0.76
  text "5V" at 20.447,0.254 h1.02
  text "1H" at 24.257,0.254 h1.02
  text "1M" at 28.067,0.254 h1.02
Mechanical 2:
  lines w0.254: 0,3 ccw(c3,3) 3,0 79,0 ccw(c79,3) 82,3 82,76 ccw(c79,76) 79,79 3,79 ccw(c3,76) 0,76 0,3